# Altium PCB PCB1.pcbdoc
Units mil, origin at the board's own origin, x right, y up, seen from the top; angles counter-clockwise.
Board outline 2340 x 2457.34 mil, 2 copper layers (Top Layer, Bottom Layer); 37 components, 23 nets, 164 pads, 50 vias.
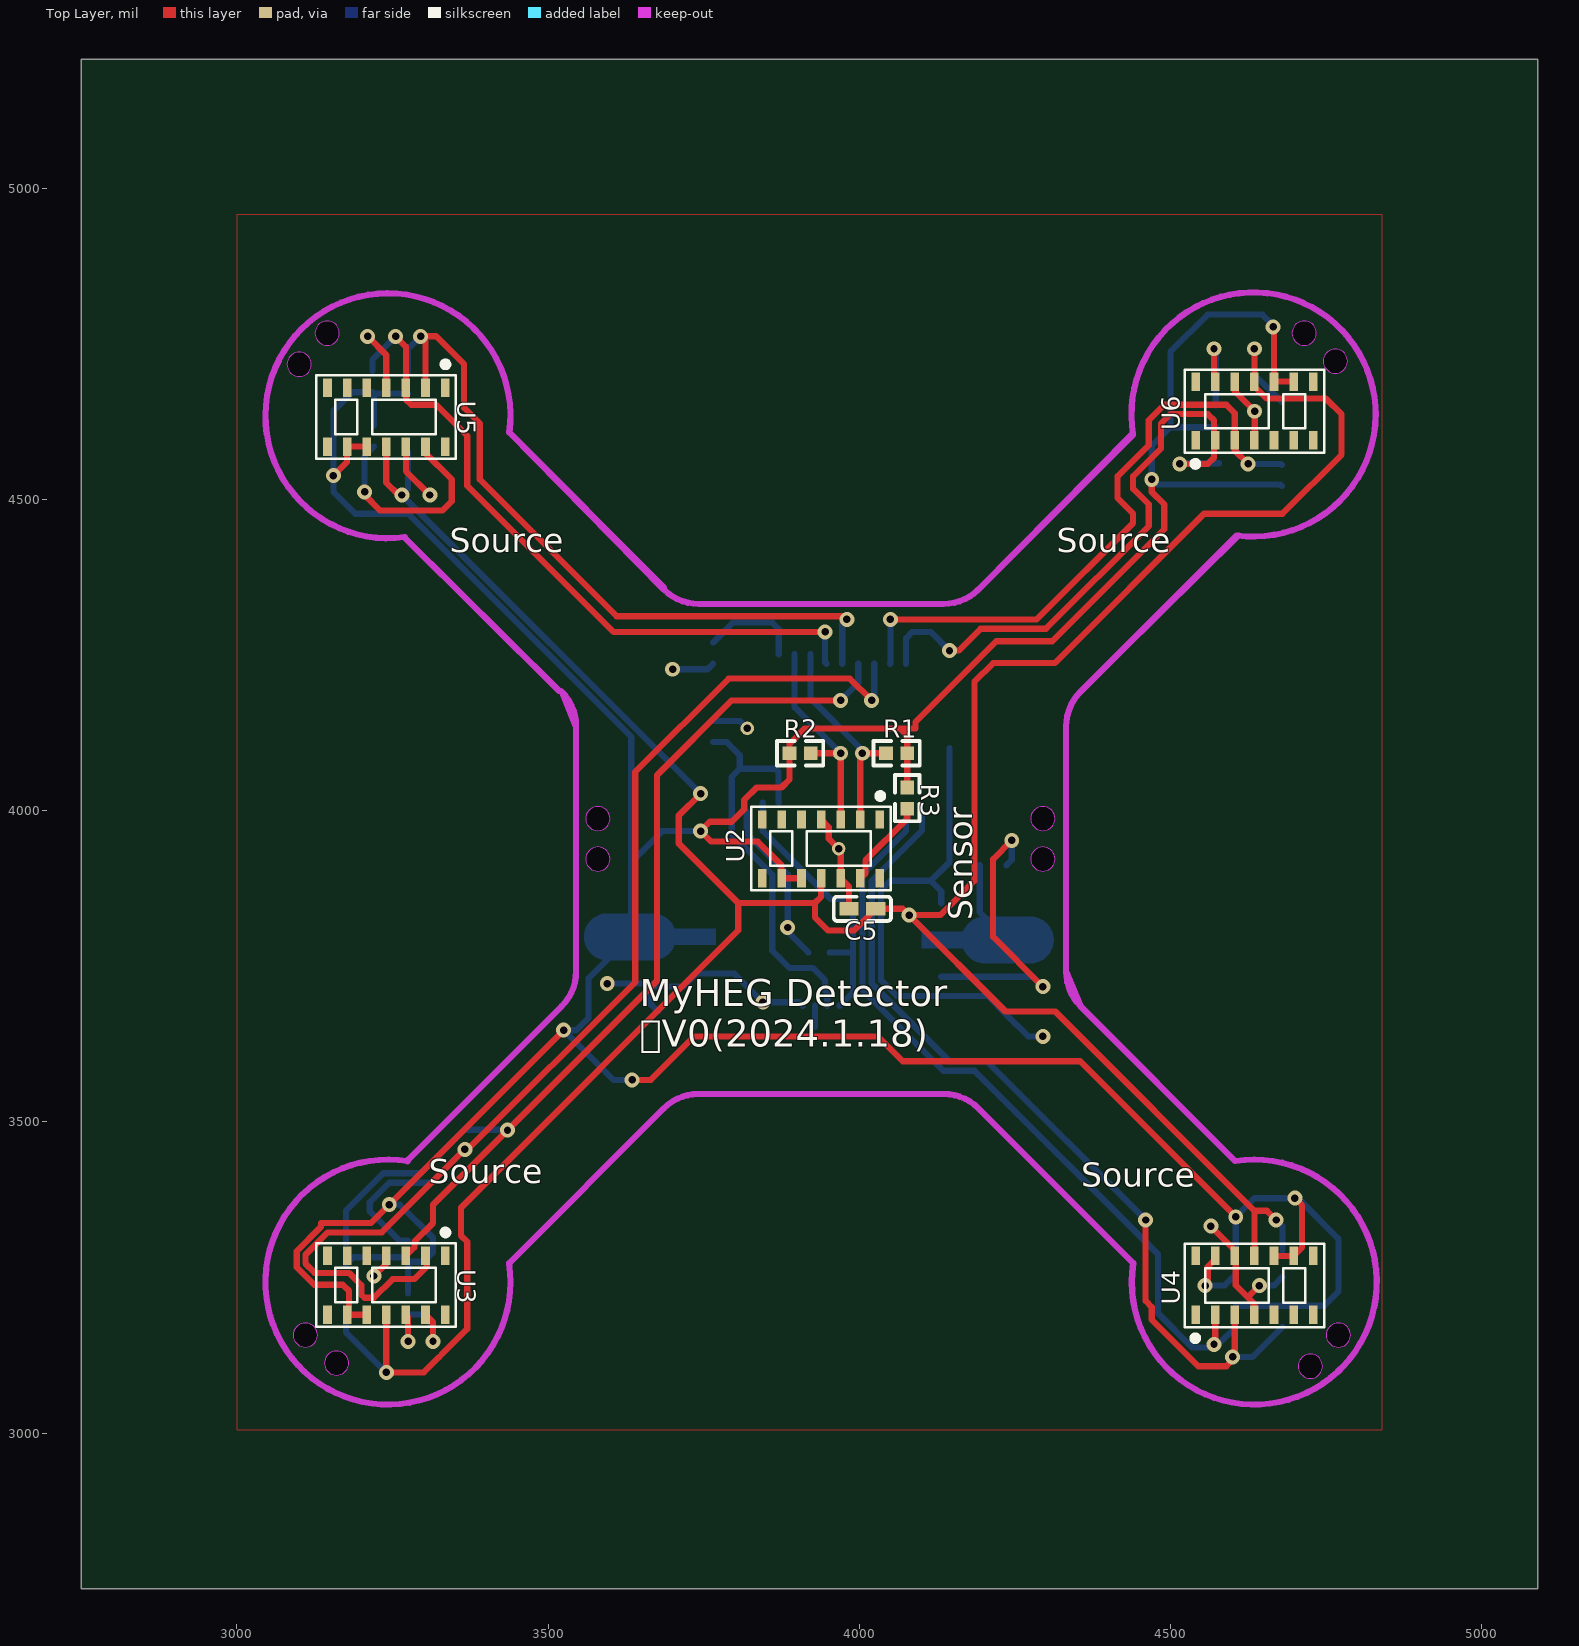
[diagram p0: Top Layer view]
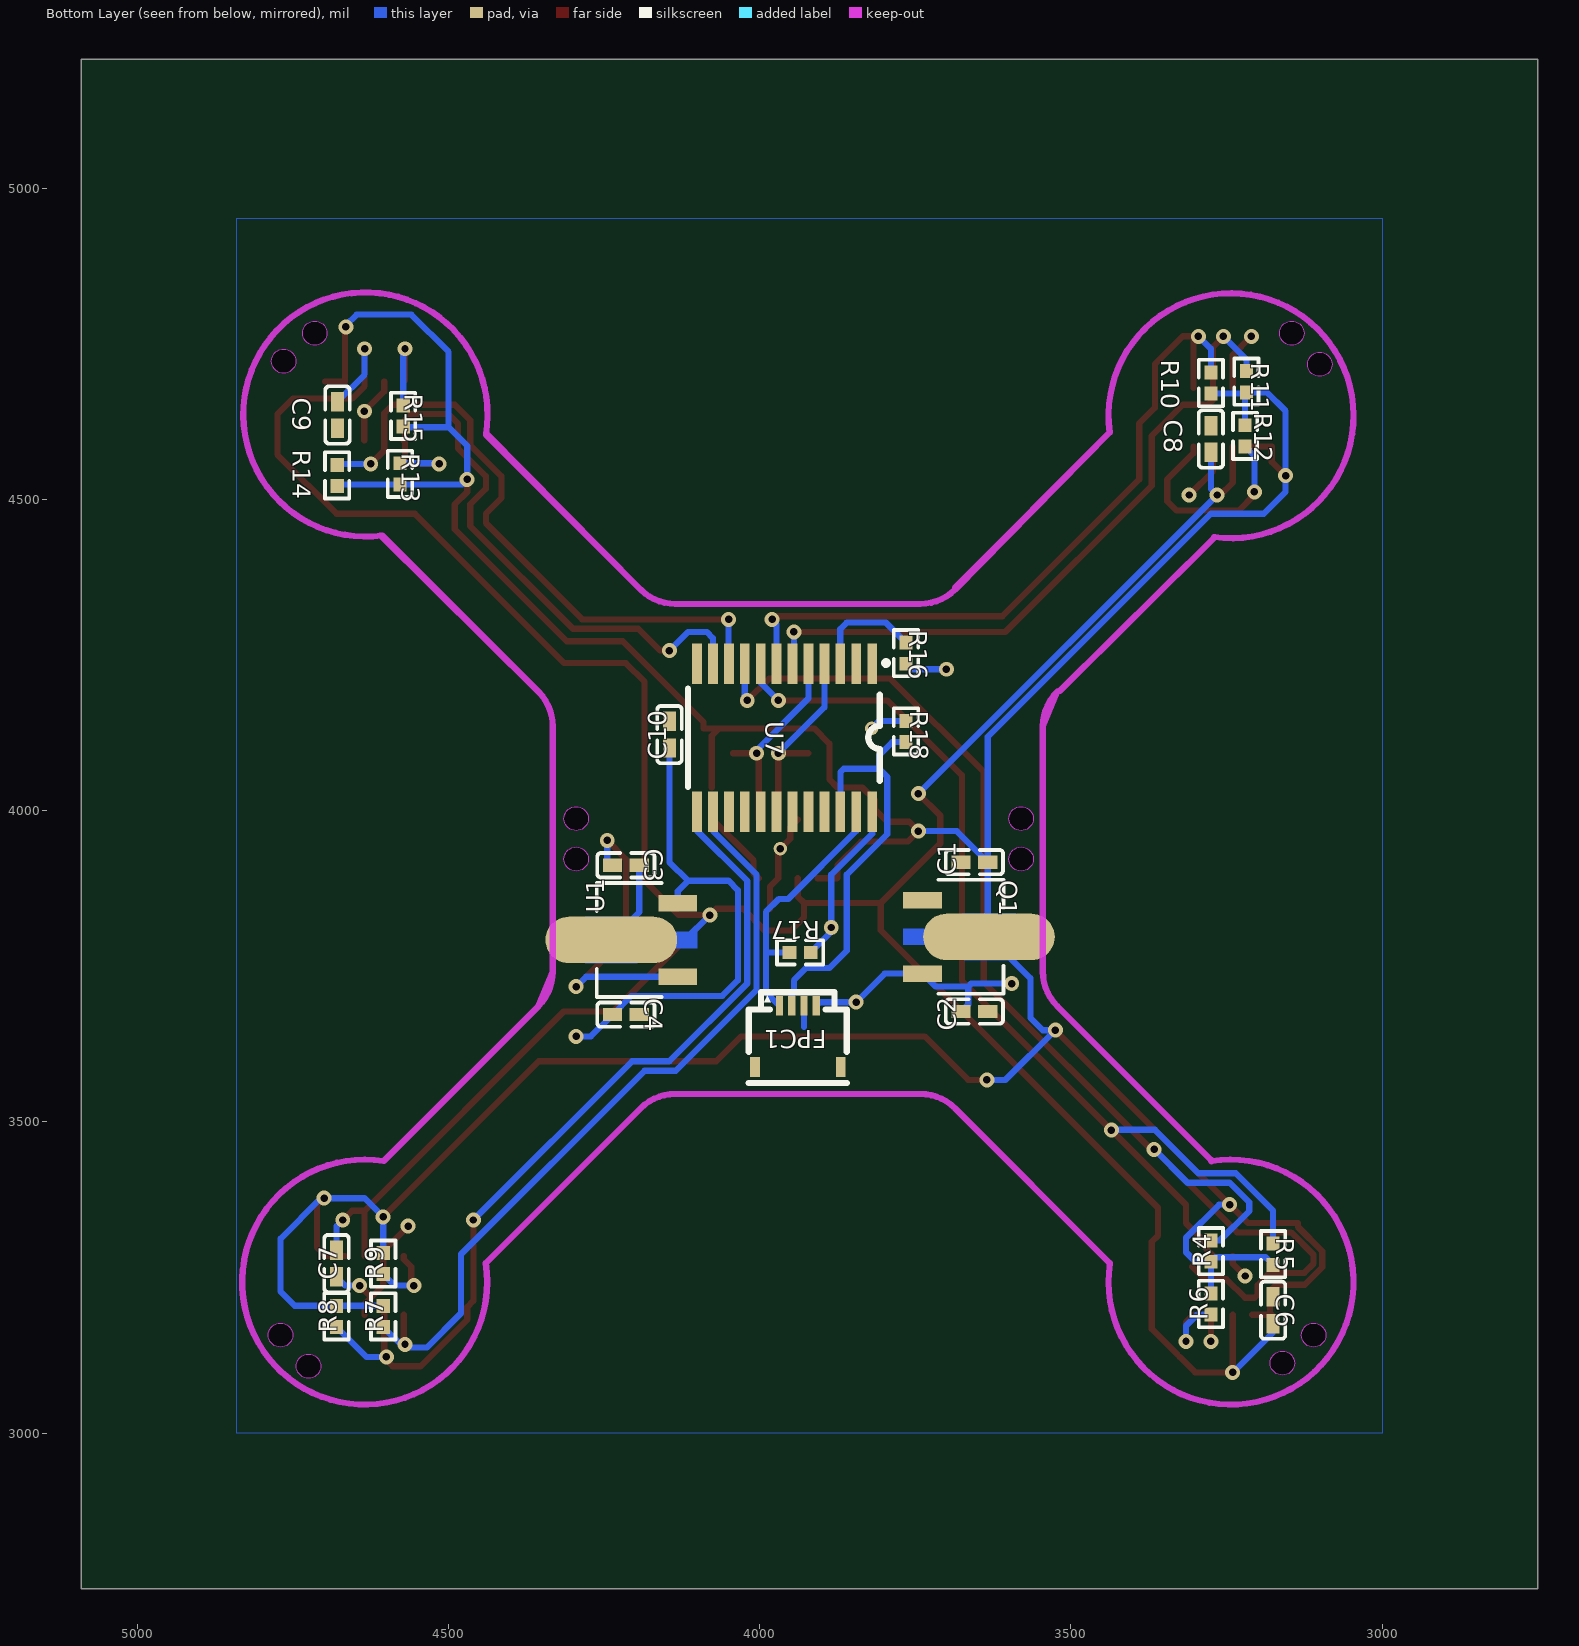
[diagram p1: Bottom Layer view, seen from below]

## Layer stack, top to bottom
Top Layer: signal copper (thickness not stored)
Dielectric: dielectric 12.6, FR-4, Dk 4.8
Bottom Layer: signal copper (thickness not stored)

## Board outline
5090,2750 2750,2750 2750,5207.34 5090,5207.34
cut-out: 3119.68,4717.34 ccw(c3100,4717.03) 3080.32,4717.34 ccw(c3100,4717.65)
cut-out: 3164.68,4767.34 ccw(c3145,4767.03) 3125.32,4767.34 ccw(c3145,4767.65)
cut-out: 4784.69,4722.34 ccw(c4765,4722.03) 4745.32,4722.34 ccw(c4765,4722.65)
cut-out: 4734.69,4767.34 ccw(c4715,4767.03) 4695.32,4767.34 ccw(c4715,4767.65)
cut-out: 3179.68,3112.34 ccw(c3160,3112.03) 3140.32,3112.34 ccw(c3160,3112.65)
cut-out: 3129.68,3157.34 ccw(c3110,3157.03) 3090.32,3157.34 ccw(c3110,3157.65)
cut-out: 4744.69,3107.34 ccw(c4725,3107.03) 4705.32,3107.34 ccw(c4725,3107.65)
cut-out: 4789.69,3157.34 ccw(c4770,3157.03) 4750.32,3157.34 ccw(c4770,3157.65)
cut-out: 4314.69,3922.34 ccw(c4295,3922.03) 4275.32,3922.34 ccw(c4295,3922.65)
cut-out: 4314.69,3987.34 ccw(c4295,3987.03) 4275.32,3987.34 ccw(c4295,3987.65)
cut-out: 3599.68,3922.34 ccw(c3580,3922.03) 3560.32,3922.34 ccw(c3580,3922.65)
cut-out: 3599.68,3987.34 ccw(c3580,3987.03) 3560.32,3987.34 ccw(c3580,3987.65)

## Components (designator, comment, footprint, x,y, rotation, side; value= is the part's Value field where it differs from the comment)
C1 "CL05A106MQ5NUNC" C0402 3655,3917.34 r180 bottom
C2 "CL05A106MQ5NUNC" C0402 3655,3677.34 r0 bottom
C3 "CL05A106MQ5NUNC" C0402 4215,3912.34 r180 bottom
C4 "CL05A106MQ5NUNC" C0402 4215,3672.34 r0 bottom
C5 "CL05A106MQ5NUNC" C0402 4005,3842.34 r0 top
C6 "CL05A106MQ5NUNC" C0402 3175,3197.34 r90 bottom
C7 "CL05A106MQ5NUNC" C0402 4680,3272.34 r90 bottom
C8 "CL05A106MQ5NUNC" C0402 3275,4597.34 r270 bottom
C9 "CL05A106MQ5NUNC" C0402 4678.54,4635.88 r90 bottom
C10 "CL05A106MQ5NUNC" C0402 4145,4122.34 r90 bottom
FPC1 "HC-FPC-05-09-4RLTAG" FPC-SMD_4P-P0.50_HC-FPC-05-09-4RLTAG 3938.7,3637.34 r0 bottom
Q1 "AMS1117-3.3V_C5120796" SOT-89-3_L4.5-W2.5-P1.50-LS4.2-BR 3685,3797.34 r0 bottom
R1 "0402WGF4701TCE" R0402 4060,4092.34 r0 top
R2 "0402WGF4701TCE" R0402 3905,4092.34 r180 top
R3 "0402WGF4701TCE" R0402 4077.04,4020.3 r90 top
R4 "0402WGF4701TCE" R0402 3275,3292.34 r270 bottom
R5 "0402WGF4701TCE" R0402 3175,3287.34 r270 bottom
R6 "0402WGF4701TCE" R0402 3275,3207.34 r90 bottom
R7 "0402WGF4701TCE" R0402 4605,3187.34 r90 bottom
R8 "0402WGF4701TCE" R0402 4680,3187.34 r90 bottom
R9 "0402WGF4701TCE" R0402 4605,3272.34 r90 bottom
R10 "0402WGF4701TCE" R0402 3275,4687.34 r270 bottom
R11 "0402WGF4701TCE" R0402 3217.96,4689.38 r270 bottom
R12 "0402WGF4701TCE" R0402 3220,4602.34 r90 bottom
R13 "0402WGF4701TCE" R0402 4577.96,4541.22 r270 bottom
R14 "0402WGF4701TCE" R0402 4679.02,4538.78 r270 bottom
R15 "0402WGF4701TCE" R0402 4572.96,4634.38 r270 bottom
R16 "0402WGF4701TCE" R0402 3765,4253.26 r90 bottom
R17 "0402WGF4701TCE" R0402 3935,3772.34 r0 bottom
R18 "0402WGF4701TCE" R0402 3765,4127.34 r270 bottom
U1 "AMS1117-1.8_C880751" SOT-89-3_L4.5-W2.5-P1.50-LS4.2-BR 4185,3792.34 r180 bottom
U2 "MAX30102EFD+T_1" OESIP-14_L5.6-W3.3-P0.80-TL 3938.7,3938.64 r270 top
U3 "MAX30102EFD+T_1" OESIP-14_L5.6-W3.3-P0.80-TL 3240,3237.34 r270 top
U4 "MAX30102EFD+T_1" OESIP-14_L5.6-W3.3-P0.80-TL 4635,3237.34 r90 top
U5 "MAX30102EFD+T_1" OESIP-14_L5.6-W3.3-P0.80-TL 3240,4632.34 r270 top
U6 "MAX30102EFD+T_1" OESIP-14_L5.6-W3.3-P0.80-TL 4635,4642.34 r90 top
U7 "TCA9548APWR" TSSOP-24_L7.8-W4.4-P0.65-LS6.4-BL 3960,4117.34 r0 bottom

## Footprints (in the part's own frame and the unit in brackets; to place one, negate y for a bottom-side part, rotate by r counter-clockwise, add the part's x,y. Pads: shape width x height; smd on the part's side, far side on the other; paste and mask are expansions set on the pad)
C0402 [mm]
  rect 0.79x0.54 smd: 1(-0.545,0) 2(0.545,0)
  silkscreen extent -1.17,-0.5 1.17,0.5
FPC-SMD_4P-P0.50_HC-FPC-05-09-4RLTAG [mm]
  rect 0.3x0.8 smd: 1(0.75,-1.25) 2(0.25,-1.25) 3(-0.25,-1.25) 4(-0.75,-1.25)
  rect 0.4x0.8 smd: 5(-1.75,1.25) 6(1.75,1.25)
  silkscreen extent -2,-1.8 2,1.91
OESIP-14_L5.6-W3.3-P0.80-TL [mm]
  rect 0.75x0.35 smd: 1(-1.2,2.4) 2(-1.2,1.6) 3(-1.2,0.8) 4(-1.2,0) 5(-1.2,-0.8) 6(-1.2,-1.6) 7(-1.2,-2.4) 8(1.2,-2.4) 9(1.2,-1.6) 10(1.2,-0.8) 11(1.2,0) 12(1.2,0.8) 13(1.2,1.6) 14(1.2,2.4)
  silkscreen extent -2.28,-2.86 1.69,2.84
R0402 [mm]
  rect 0.566x0.54 smd: 1(-0.433,0) 2(0.433,0)
  silkscreen extent -0.94,-0.5 0.94,0.5
SOT-89-3_L4.5-W2.5-P1.50-LS4.2-BR [mm]
  rect 1.575x0.672 smd: 1(1.356,-1.5) 3(1.356,1.5)
  oval 5.377x1.9 smd: 2(-1.356,0)
  Top Layer region: -2.283,0.95 -0.429,0.95 -0.384,0.949 -0.34,0.946 -0.296,0.94 -0.252,0.933 -0.208,0.924 -0.165,0.912 -0.123,0.899 -0.081,0.884 -0.04,0.866 0,0.847 0.04,0.826 0.078,0.803 0.115,0.779 0.151,0.752 0.185,0.724 0.219,0.695 0.251,0.664 0.281,0.631 0.31,0.597 0.337,0.562 0.362,0.525 0.386,0.488 0.408,0.449 0.428,0.409 0.447,0.33 2.144,0.33 2.144,-0.33 0.447,-0.33 0.428,-0.409 0.408,-0.449 0.386,-0.488 0.362,-0.526 0.337,-0.562 0.31,-0.597 0.281,-0.631 0.251,-0.664 0.219,-0.695 0.185,-0.725 0.151,-0.753 0.115,-0.779 0.078,-0.804 0.04,-0.827 0,-0.848 -0.04,-0.867 -0.081,-0.884 -0.123,-0.899 -0.165,-0.913 -0.208,-0.924 -0.252,-0.934 -0.296,-0.941 -0.34,-0.946 -0.384,-0.949 -0.429,-0.95 -2.283,-0.95 -2.328,-0.949 -2.372,-0.946 -2.416,-0.941 -2.46,-0.934 -2.504,-0.924 -2.547,-0.913 -2.589,-0.899 -2.631,-0.884 -2.672,-0.867 -2.713,-0.848 -2.752,-0.827 -2.79,-0.804 -2.827,-0.779 -2.863,-0.753 -2.898,-0.725 -2.931,-0.695 -2.963,-0.664 -2.993,-0.631 -3.022,-0.597 -3.049,-0.562 -3.075,-0.526 -3.098,-0.488 -3.12,-0.449 -3.141,-0.409 -3.159,-0.369 -3.175,-0.327 -3.189,-0.285 -3.202,-0.242 -3.212,-0.199 -3.22,-0.155 -3.227,-0.111 -3.231,-0.067 -3.233,-0.022 -3.233,0.022 -3.231,0.067 -3.227,0.111 -3.22,0.155 -3.212,0.199 -3.202,0.242 -3.189,0.285 -3.175,0.327 -3.159,0.369 -3.141,0.409 -3.12,0.449 -3.098,0.488 -3.075,0.525 -3.049,0.562 -3.022,0.597 -2.993,0.631 -2.963,0.664 -2.931,0.695 -2.898,0.724 -2.863,0.752 -2.827,0.779 -2.79,0.803 -2.752,0.826 -2.713,0.847 -2.672,0.866 -2.631,0.884 -2.589,0.899 -2.547,0.912 -2.504,0.924 -2.46,0.933 -2.416,0.94 -2.372,0.946 -2.328,0.949
  silkscreen extent -1.95,-2.33 0.7,2.33
TSSOP-24_L7.8-W4.4-P0.65-LS6.4-BL [mm]
  rect 0.4x1.65 smd: 1(-3.575,-3.023) 2(-2.925,-3.023) 3(-2.275,-3.023) 4(-1.625,-3.023) 5(-0.975,-3.023) 6(-0.325,-3.023) 7(0.325,-3.023) 8(0.975,-3.023) 9(1.625,-3.023) 10(2.275,-3.023) 11(2.925,-3.023) 12(3.575,-3.023) 13(3.575,3.023) 14(2.925,3.023) 15(2.275,3.023) 16(1.625,3.023) 17(0.975,3.023) 18(0.325,3.023) 19(-0.325,3.023) 20(-0.975,3.023) 21(-1.625,3.023) 22(-2.275,3.023) 23(-2.925,3.023) 24(-3.575,3.023)
  silkscreen extent -4.24,-3.15 3.94,2.01

## Free pads (board coordinates)
  round 21.65 hole 11.81: 25(3820,4132.34) 26(3966.91,3939.1)

## Via types
v1: diameter 24.02, hole 12.01, Top Layer to Bottom Layer, 50 vias

## Nets (pads, with @x,y where several pads share a name; then routed paths per layer and width w, separated by ;. In a path a pad name is that pad's centre, name@x,y a point inside that pad or via, vN(x,y) a via of type N, cw(c..) or ccw(c..) an arc to the next point about the centre after c; other vN are vias at no path point)
1V8: C3.2 C5.2 C6.1 C7.2 C8.2 C9.2 U1.2 U2.11 U3.11 U4.11 U5.11 U6.11 | length 5472.2
  Top Layer w10: U3.11 v1(3240,3097.34) 3300,3097.34 3325,3122.34 ; U5.11 3240,4527.34 3260,4507.34 v1(3265,4507.34) ; 3330,3127.34 3370,3167.34 3370,3307.34 3360,3317.34 3360,3362.34 3805.59,3807.93 3805.59,3851.75 ; v1(3745,4027.34) 3710,3992.34 3710,3947.34 3805.59,3851.75 ; U2.11 3938.7,3861.75 3928.7,3851.75 ; U4.11 4635,3357.34 ; v1(4635,4742.34) U6.11 4635,4682.34 4655,4662.34 4750,4662.34 4775,4637.34 4775,4572.34 4680,4477.34 4553.96,4477.34 4313.96,4237.34 4215,4237.34 4185,4207.34 4185,3887.34 4130,3832.34 v1(4080,3832.34) ; v1(4670,3342.34) 4655,3357.34 4635,3357.34 ; 3805.59,3851.75 3928.7,3851.75 ; 3928.7,3851.75 3928.7,3828.64 3950,3807.34 3991.46,3807.34 C5.2 4070,3842.34 v1(4080,3832.34) ; v1(4080,3832.34) 4235,3677.34 4315,3677.34 4635,3357.34
  Bottom Layer w10: C6.1 3175,3161.74 3239.4,3097.34 v1(3240,3097.34) ; C8.2 3275,4517.34 v1(3265,4507.34) v1(3745,4027.34) ; v1(4080,3832.34) 4120.01,3792.34 U1.2 4193.54,3837.19 C3.2 ; v1(4635,4742.34) 4635,4700.88 C9.2 ; v1(4670,3342.34) 4680,3332.34 C7.2
3V3: C1.2 Q1.2 R1.2 R2.2 R3.2 R4.2 R5.2 R6.2 R7.2 R8.2 R9.2 R10.2 R11.2 R12.2 R13.2 R14.2 R15.2 U2.9 U2.10 U3.9 U3.10 U4.9 U4.10 U5.9 U5.10 U6.9 U6.10 | length 6929.2
  Top Layer w10: v1(3155,4538.48) 3177.01,4560.49 U5.9 U5.10 ; U3.9 U3.9@3180,3193.09 ; U3.10 3182.99,3190.1 U3.9@3180,3193.09 ; v1(3525,3647.34) v1(3244.75,3367.1) 3215,3337.34 3135,3337.34 3135,3331.1 3096.09,3292.19 3096.09,3266.43 3124.19,3238.33 3170,3238.33 3180,3228.33 U3.9@3180,3193.09 ; v1(3635,3567.34) 3665,3567.34 3735,3637.34 4030,3637.34 4070,3597.34 4355,3597.34 v1(4605,3347.34) ; U2.10 U2.9 3875,3892.11 3875,3912.34 3837.01,3950.33 3762.01,3950.33 v1(3745,3967.34) 3760,3982.34 3795,3982.34 3815,4002.34 3815,4017.34 3835,4037.34 3875,4037.34 3887.96,4050.3 R2.2 3887.96,4107.97 3912.33,4132.34 4065,4132.34 ; R3.2 R1.2 4077.04,4120.3 4065,4132.34 ; v1(4470,4532.34) 4470,4512.14 4490,4492.14 4490,4452.34 4310,4272.34 4220.2,4272.34 4090.2,4142.34 4090.2,4132.34 4065,4132.34 ; v1(4665,4777.34) 4666.49,4775.85 U6.10 U6.9 ; U4.10 U4.9 4711.6,3298.2 4711.6,3365.74 v1(4700,3377.34)
  Bottom Layer w10: R5.2 3187.04,3282.34 3267.96,3282.34 R4.2 ; R12.2 R11.2@3220,4670.3 ; v1(3244.75,3367.1) 3261.76,3367.1 3315,3313.86 3315,3290.3 3300,3275.3 R4.2 ; R6.2 R4.2 ; R10.2 R11.2@3220,4670.3 ; v1(3635,3567.34) 3605,3567.34 v1(3525,3647.34) 3545,3647.34 3565,3667.34 3565,3730.74 Q1.2 3633.54,3799.28 C1.2 ; v1(3745,3967.34) 3683.54,3967.34 C1.2 ; R15.2 4571.85,4616.23 4500,4616.23 ; R7.2 R8.2 4747.04,3204.38 4770,3227.34 4770,3312.34 4705,3377.34 v1(4700,3377.34) 4635,3377.34 v1(4605,3347.34) R9.2 ; v1(4665,4777.34) 4665,4779.97 4647.63,4797.34 4560,4797.34 4500,4737.34 4500,4616.23 ; R14.2 4676.58,4524.18 R13.2 4478.16,4524.18 v1(4470,4532.34) 4470,4586.23 4500,4616.23 ; R11.2@3220,4670.3 R11.2 3185,4672.34 3155,4642.34 v1(3155,4538.48) 3155,4512.34 3190,4477.34 3275,4477.34 3633.54,4118.8 C1.2
$1N1437: R3.1 U2.13 | length 143.1
  Top Layer w10: U2.13 4010,3899.7 4010,3920.09 4077.04,3987.13 R3.1
$1N1748: R6.1 U3.13 | length 120.2
  Top Layer w10: U3.13 3315,3178.1 v1(3315,3147.34)
  Bottom Layer w10: R6.1 3297.04,3190.3 3315,3172.34 v1(3315,3147.34)
$1N2002: R9.1 U4.13 | length 111.5
  Top Layer w10: v1(4555.61,3236.88) 4560,3241.28 4560,3267.34 4572,3279.34 U4.13
  Bottom Layer w10: v1(4555.61,3236.88) 4586.58,3236.88 R9.1
$1N2256: R12.1 U5.13 | length 340.9
  Top Layer w10: v1@3205,4507.34 3230,4482.34 3330,4482.34 3345,4497.34 3345,4532.34 3303,4574.34 U5.13
  Bottom Layer w10: v1(3205,4512.34) 3205,4570.3 R12.1
$1N2510: R15.1 U6.13 | length 145.7
  Top Layer w10: v1(4570,4742.34) 4570,4691.59 U6.13
  Bottom Layer w10: v1(4570,4742.34) 4572.96,4739.38 R15.1
$1N3057: R16.2 U7.3 | length 163.6
  Bottom Layer w10: R16.2 3797.04,4302.34 3860,4302.34 3870.44,4291.9 U7.3@3870.44,4251.34
ESPSCL: FPC1.2 R18.2 U7.22 | length 658.5
  Bottom Layer w10: R18.2 3787.04,4110.3 3807.96,4089.38 3807.96,4067.34 ; U7.22@3870.44,4013.34 3870,4013.78 3870,4062.34 3865,4067.34 3807.96,4067.34 ; FPC1.2 3948.54,3707.31 3945,3710.85 3945,3727.34 3925,3747.34 3887.76,3747.34 3860,3775.1 3860,3897.34 3795,3962.34 3795,4054.38 3807.96,4067.34
ESPSDA: FPC1.1 R17.2 U7.23 | length 442.7
  Bottom Layer w10: U7.23@3844.85,4013.34 3844.85,3967.49 3954.21,3858.14 3969.21,3858.14 3990,3837.34 3990,3772.47 ; R17.2 3989.87,3772.34 3990,3772.47 ; FPC1.1 3990,3708.33 3990,3772.47
GND: C1.1 C2.1 C3.1 C4.1 C5.1 C6.2 C7.1 C8.1 C9.1 C10.2 FPC1.3 pad.26 Q1.1 U1.1 U2.4 U2.12 U3.4 U3.12 U4.4 U4.12 U5.4 U5.12 U6.4 U6.12 U7.1 U7.2 U7.12 U7.21 | length 1313.5
  Top Layer w10: v1(3210,4762.34) 3240,4732.34 U5.4 ; v1(3220,3252.34) 3240,3272.34 U3.4 ; U3.12 3275,3186.6 v1(3275,3147.34) ; U5.12 3271.5,4545.84 v1(3310,4507.34) ; U2.4 3951.09,3973.5 3951.09,3954.92 pad.26 3970.2,3935.81 U2.12 3983.54,3878.06 C5.1 ; v1(4245,3952.34) 4215,3922.34 4215,3797.34 v1(4295,3717.34) ; v1(4565,3332.34) 4603.5,3293.84 U4.12 4605,3283.09 4605,3237.34 4622.48,3219.86 ; U6.12 4603.5,4673.71 v1(4635.33,4641.89) 4635.33,4595.42 U6.4 ; U4.4 4635,3207.34 4622.48,3219.86 ; v1(4642.81,3236.89) 4625.79,3219.86 4622.48,3219.86
  Bottom Layer w10: 3928.86,3652.34 FPC1.3 ; U1.1 4279.06,3733.29 v1(4295,3717.34) ; C3.1 4245,3920.88 v1(4245,3952.34) ; v1(4642.81,3236.89) 4666,3236.89 C7.1
SCL0: R1.1 U2.2 U7.5 | length 339.3
  Top Layer w10: U2.2 4001.69,4089.03 v1(4005,4092.34) R1.1
  Bottom Layer w10: U7.5@3921.62,4251.34 3921.62,4180.72 4005,4097.34 v1(4005,4092.34)
SCL1: R10.1 U5.2 U7.7 | length 1193.5
  Top Layer w10: U5.2 3302.99,4754.35 v1(3295,4762.34) 3320,4762.34 3365,4717.34 3365,4647.34 3390,4622.34 3390,4532.34 3610,4312.34 3975,4312.34 v1(3980,4307.34)
  Bottom Layer w10: R10.1 3275,4742.34 v1(3295,4762.34) ; U7.7 3972.79,4300.13 v1(3980,4307.34)
SCL2: R4.1 U3.2 U7.9 | length 2110.7
  Top Layer w10: 3305,3267.34 3285,3247.34 3250,3247.34 3220,3217.34 3205,3217.34 3200,3222.34 3200,3237.34 3180,3257.34 3125,3257.34 3110.1,3272.24 3110.1,3286.38 3146.06,3322.34 3232.54,3322.34 v1(3366.09,3455.9) 3371.22,3455.9 3640,3724.68 3640,4062.34 3790,4212.34 3985,4212.34 v1(4020,4177.34)
  Bottom Layer w10: R4.1 3260.86,3309.38 3213.52,3356.72 3213.52,3370.86 3245,3402.34 3312.54,3402.34 v1(3366.09,3455.9) ; v1(4020,4177.34) 4023.98,4181.32 U7.9
SCL3: R13.1 U6.2 U7.11 | length 1005
  Top Layer w10: v1(4145,4257.34) 4160,4257.34 4195,4292.34 4300,4292.34 4465,4457.34 4465,4492.34 4440,4517.34 4440,4537.34 4485,4582.34 4485,4622.34 4500,4637.34 4560,4637.34 4570,4627.34 U6.2@4570,4597.11 ; v1(4515,4557.34) 4560,4557.34 4570,4567.34 U6.2@4570,4597.11 ; U6.2 U6.2@4570,4597.11
  Bottom Layer w10: U7.11 4075.16,4277.5 4085,4287.34 4115,4287.34 v1(4145,4257.34) ; v1(4515,4557.34) 4515.92,4558.26 R13.1
SCL4: R7.1 U4.2 U7.14 | length 1271.1
  Top Layer w10: v1(4570,3142.34) 4572.01,3144.35 U4.2
  Bottom Layer w10: U7.14 4075.16,3967.5 4005,3897.34 4005,3712.34 4135,3582.34 4185,3582.34 4480,3287.34 4480,3192.34 4535,3137.34 4565,3137.34 v1(4570,3142.34) 4577.04,3142.34 R7.1
SDA0: R2.1 U2.3 U7.4 | length 344.1
  Top Layer w10: R2.1 v1(3970,4092.34) 3970.2,4092.14 U2.3
  Bottom Layer w10: U7.4@3896.03,4251.34 3896.03,4166.31 v1(3970,4092.34)
SDA1: R11.1 U5.3 U7.6 | length 1106.6
  Top Layer w10: v1(3255,4762.34) 3271.5,4745.84 U5.3 3271.5,4660.84 3280,4652.34 3320,4652.34 3370,4602.34 3370,4522.34 3605,4287.34 v1(3945,4287.34)
  Bottom Layer w10: R11.1 3217.96,4725.3 v1(3255,4762.34) ; v1(3945,4287.34) 3945,4238.55 U7.6
SDA2: R5.1 U3.3 U7.8 | length 1722.2
  Top Layer w10: U3.3 3285.1,3298.19 3285.1,3307.44 3315,3337.34 3315,3367.14 v1(3434.72,3486.86) 3675,3727.14 3675,4057.34 3795,4177.34 v1(3970,4177.34)
  Bottom Layer w10: R5.1 3175,3357.34 3235,3417.34 3295,3417.34 3365,3487.34 v1@3435,3487.34 ; v1(3970,4177.34) 3998.39,4205.73 U7.8
SDA3: R14.1 U6.3 U7.10 | length 1021
  Top Layer w10: v1(4050,4307.34) 4285,4307.34 4440,4462.34 4440,4477.34 4415,4502.34 4415,4537.34 4465,4587.34 4465,4627.34 4490,4652.34 4590,4652.34 4603.5,4638.84 U6.3 4603.5,4578.84 v1(4625,4557.34)
  Bottom Layer w10: U7.10 4050,4236.77 v1(4050,4307.34) ; v1(4625,4557.34) 4677.5,4557.34 R14.1
SDA4: R8.1 U4.3 U7.13 | length 1414.4
  Top Layer w10: v1(4460,3342.34) 4460,3212.34 4470,3202.34 4470,3182.34 4545,3107.34 4590,3107.34 v1@4603.5,3120.84 ; v1(4600,3122.34) 4602,3122.34 v1@4603.5,3120.84 ; U4.3 v1@4603.5,3120.84
  Bottom Layer w10: U7.13 4100.74,3968.01 4020,3887.27 4020,3722.34 4145,3597.34 4205,3597.34 v1(4460,3342.34) ; v1(4600,3122.34) 4632.04,3122.34 R8.1
VCC: C2.2 C4.2 C10.1 FPC1.4 pad.25 Q1.3 R16.1 R17.1 R18.1 U1.3 U7.24 | length 1583.9
  Bottom Layer w10: v1(3595,3722.34) 3660.01,3722.34 3665.01,3717.34 ; C2.2 3665.01,3688.79 3665.01,3717.34 ; v1(3700,4227.34) 3756.12,4227.34 R16.1 ; R18.1 3807.96,4144.38 pad.25 ; U7.24 3819.26,3963.08 3885,3897.34 v1(3885,3812.34) 3885,3805.3 R17.1 ; FPC1.4 3903.39,3692.34 v1(3845,3692.34) 3799.05,3738.29 Q1.3 3717.45,3717.34 3665.01,3717.34 ; U1.3 4131.6,3870.74 4115,3887.34 ; C10.1 4145,3917.34 4115,3887.34 ; v1(4295,3637.34) 4271.46,3637.34 C4.2 4206.46,3702.34 4060,3702.34 4035,3727.34 4035,3872.34 4050,3887.34 4115,3887.34
"": FPC1.5 FPC1.6 U2.1 U2.5 U2.6 U2.7 U2.8 U2.14 U3.1 U3.5 U3.6 U3.7 U3.8 U3.14 U4.1 U4.5 U4.6 U4.7 U4.8 U4.14 U5.1 U5.5 U5.6 U5.7 U5.8 U5.14 U6.1 U6.5 U6.6 U6.7 U6.8 U6.14 U7.15 U7.16 U7.17 U7.18 U7.19 U7.20

## Polygon pours and split planes (outlines as drawn)
VCC on Top Layer (solid, remove dead copper, pour order 0): 3000,3005 4840,3005 4840,4957.34 3000,4957.34
GND on Bottom Layer (solid, remove dead copper, pour order 1): 3000,3000 4840,3000 4840,4952.34 3000,4952.34

## Keep-outs
Board Outline Layer:
  lines w10 net "": 3268.71,4439.59 3517.97,4192.34 3520,4192.34 ; 3269.67,4439.72 cw(c3242.64,4634.7) 3437.62,4607.67 ; 3274.12,3436.9 ccw(c3242.64,3242.58) 3437.17,3272.68 ; 3275,3437.34 3275,3439.18 3521.94,3686.11 ccw(c3466.26,3741.79) 3545,3741.79 3545,4135.49 ; 3437.46,3270.74 3437.46,3273.17 3686.17,3521.88 cw(c3741.85,3466.2) 3741.85,3544.94 4135.55,3544.94 cw(c4135.55,3466.2) 4191.23,3521.88 4440.09,3273.02 4440.28,3273.02 ; 4440.29,3273.08 ccw(c4634.76,3242.58) 4604.26,3437.05 ; 4603.72,3436.96 4603.72,3437.86 4355.46,3686.11 ; 3545,4135.49 ccw(c3466.26,4135.49) 3521.94,4191.17 3545,4135.49 ; 3686.17,4355.4 3686.17,4358.2 3437.71,4608.33 3686.17,4355.4 ; 3686.17,4355.4 ccw(c3741.85,4411.08) 3741.85,4332.34 4135.55,4332.34 ccw(c4135.55,4411.08) 4191.23,4355.4 ; 4191.23,4355.4 4440,4604.18 ; 4191.23,4355.4 4440,4607.34 4440,4604.18 ; 4332.4,3741.79 ccw(c4411.14,3741.79) 4355.46,3686.11 ; 4332.4,3741.79 4355.46,3686.11 ; 4332.4,3741.79 4332.4,4135.49 cw(c4411.14,4135.49) 4355.46,4191.17 ; 4355.46,4191.17 4606.64,4442.34 ; 4355.46,4191.17 4610,4442.34 4606.64,4442.34 ; 4440,4604.18 cw(c4633.52,4636.74) 4606.64,4442.34
Multi-Layer:
  region net "": 3119.68,4717.34 ccw(c3100,4717.03) 3080.32,4717.34 ccw(c3100,4717.65)
  region net "": 3164.68,4767.34 ccw(c3145,4767.03) 3125.32,4767.34 ccw(c3145,4767.65)
  region net "": 4784.69,4722.34 ccw(c4765,4722.03) 4745.32,4722.34 ccw(c4765,4722.65)
  region net "": 4734.69,4767.34 ccw(c4715,4767.03) 4695.32,4767.34 ccw(c4715,4767.65)
  region net "": 3179.68,3112.34 ccw(c3160,3112.03) 3140.32,3112.34 ccw(c3160,3112.65)
  region net "": 3129.68,3157.34 ccw(c3110,3157.03) 3090.32,3157.34 ccw(c3110,3157.65)
  region net "": 4744.69,3107.34 ccw(c4725,3107.03) 4705.32,3107.34 ccw(c4725,3107.65)
  region net "": 4789.69,3157.34 ccw(c4770,3157.03) 4750.32,3157.34 ccw(c4770,3157.65)
  region net "": 4314.69,3922.34 ccw(c4295,3922.03) 4275.32,3922.34 ccw(c4295,3922.65)
  region net "": 4314.69,3987.34 ccw(c4295,3987.03) 4275.32,3987.34 ccw(c4295,3987.65)
  region net "": 3599.68,3922.34 ccw(c3580,3922.03) 3560.32,3922.34 ccw(c3580,3922.65)
  region net "": 3599.68,3987.34 ccw(c3580,3987.03) 3560.32,3987.34 ccw(c3580,3987.65)

## Silkscreen, mask and mechanical layers (free items; w line width, h text height)
Top Silkscreen Layer:
  text "Source" at 3342,4415.66 h38.94
  text "Source" at 4317,4415.66 h38.94
  text "Sensor" at 4181.68,3823.89 h38.94 r90
  text "MyHEG Detector /  V0(2024.1.18)" at 3647.3,3620.66 h43.41
  text "Source" at 3307.89,3401.55 h38.94
  text "Source" at 4357,3395.66 h38.94
Mechanical Layer:
  circle w1 net "": c3100,4717.34 r19.68
  circle w1 net "": c3145,4767.34 r19.68
  circle w1 net "": c4765,4722.34 r19.68
  circle w1 net "": c4715,4767.34 r19.68
  circle w1 net "": c3160,3112.34 r19.68
  circle w1 net "": c3110,3157.34 r19.68
  circle w1 net "": c4725,3107.34 r19.68
  circle w1 net "": c4770,3157.34 r19.68
  circle w1 net "": c4295,3922.34 r19.68
  circle w1 net "": c4295,3987.34 r19.68
  circle w1 net "": c3580,3922.34 r19.68
  circle w1 net "": c3580,3987.34 r19.68